# Altium PCB djb_v2_rigid_left_rev.PcbDoc
Units mm, origin at the board's own origin, x right, y up, seen from the top; angles counter-clockwise.
Board outline 29 x 14.8 mm, 4 copper layers (Top Layer, Int1 (GND), Int2 (PWR), Bottom Layer), stack 1.369 mm thick; 71 components, 48 nets, 264 pads, 96 vias.
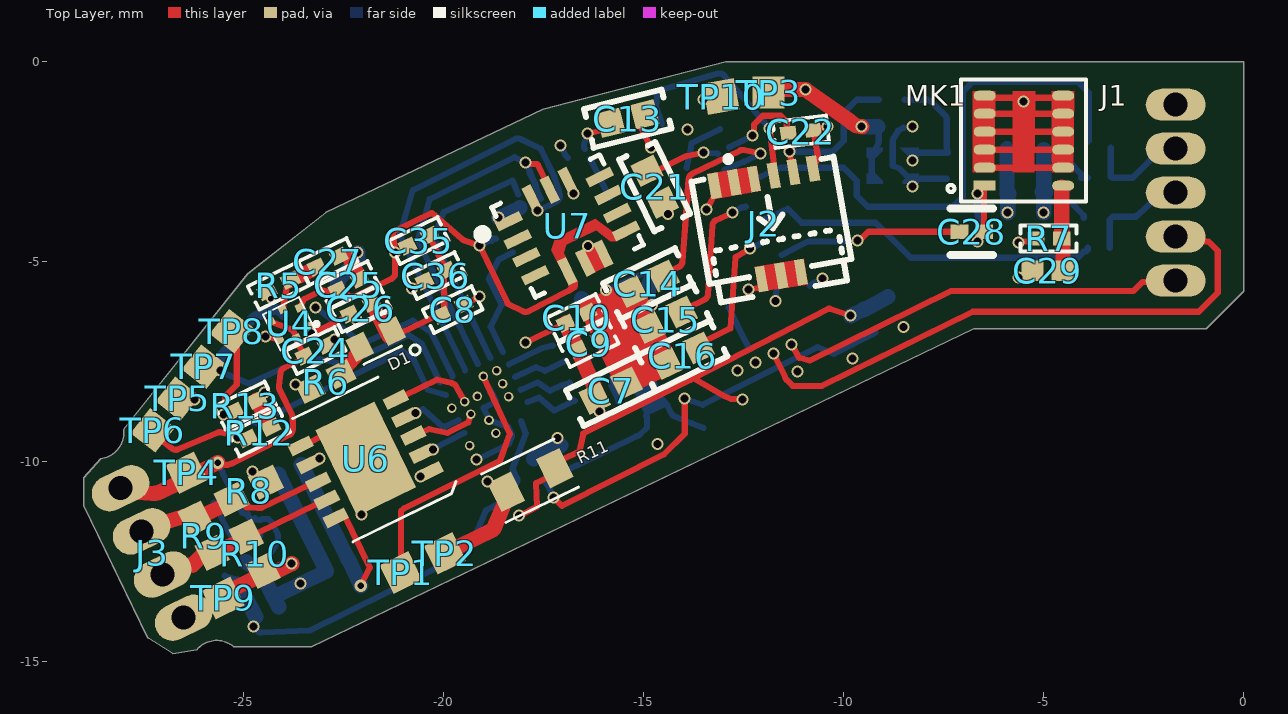
[diagram p0: Top Layer view]
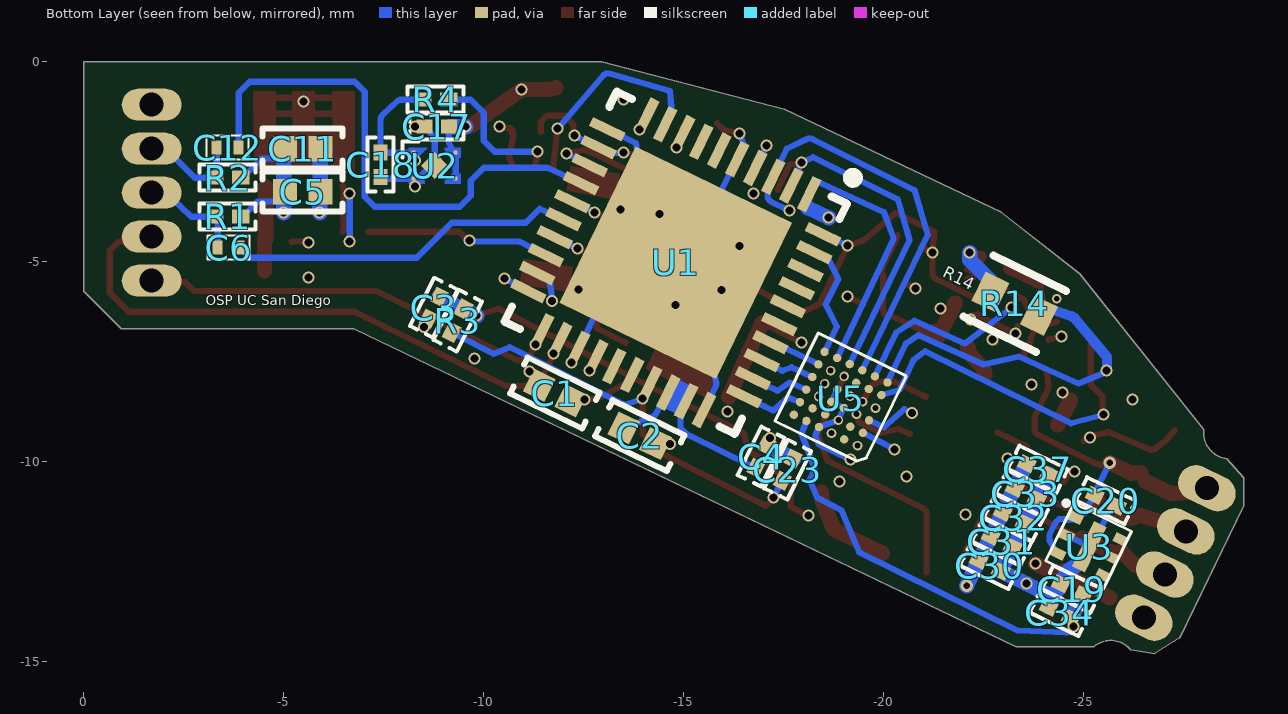
[diagram p1: Bottom Layer view, seen from below]
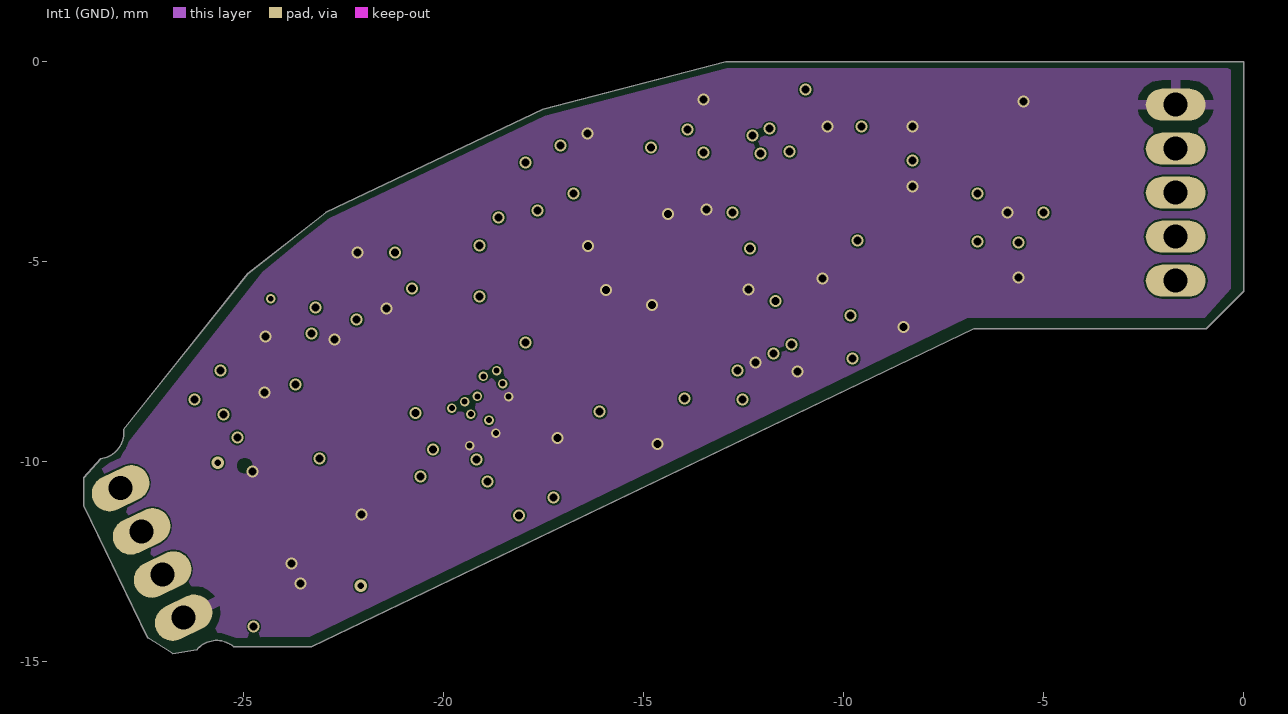
[diagram p2: Int1 (GND)]
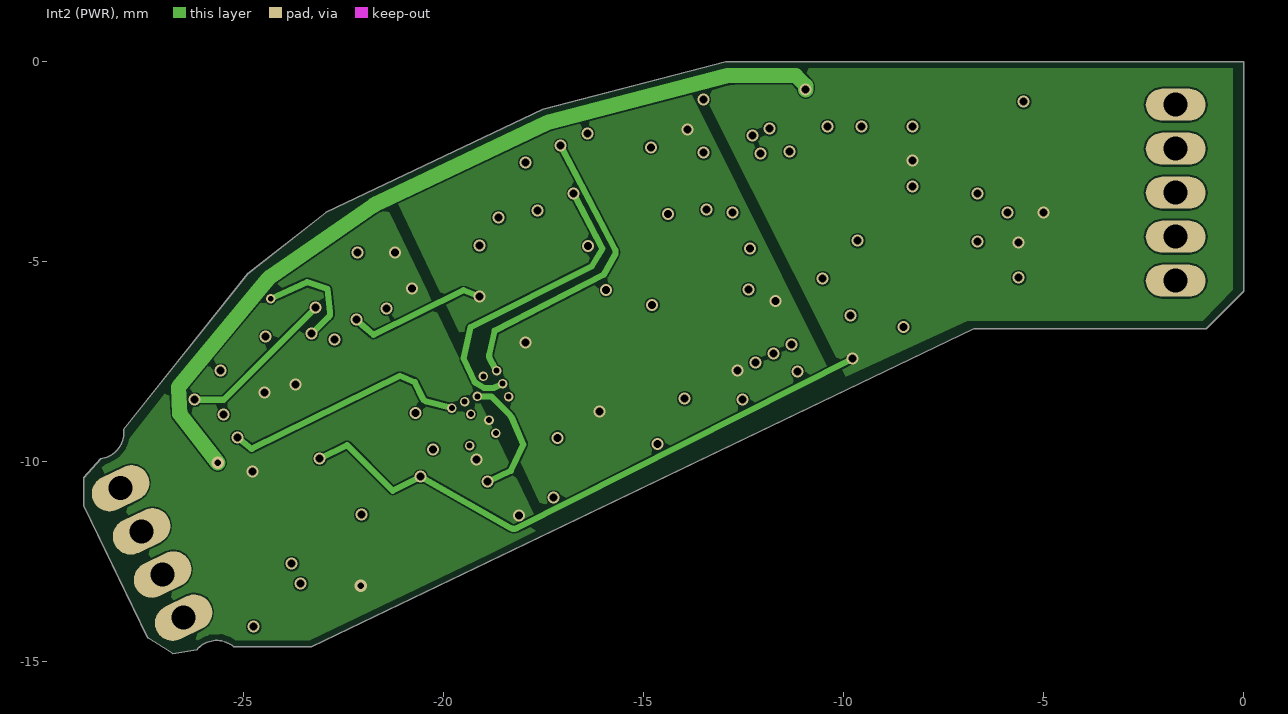
[diagram p3: Int2 (PWR)]
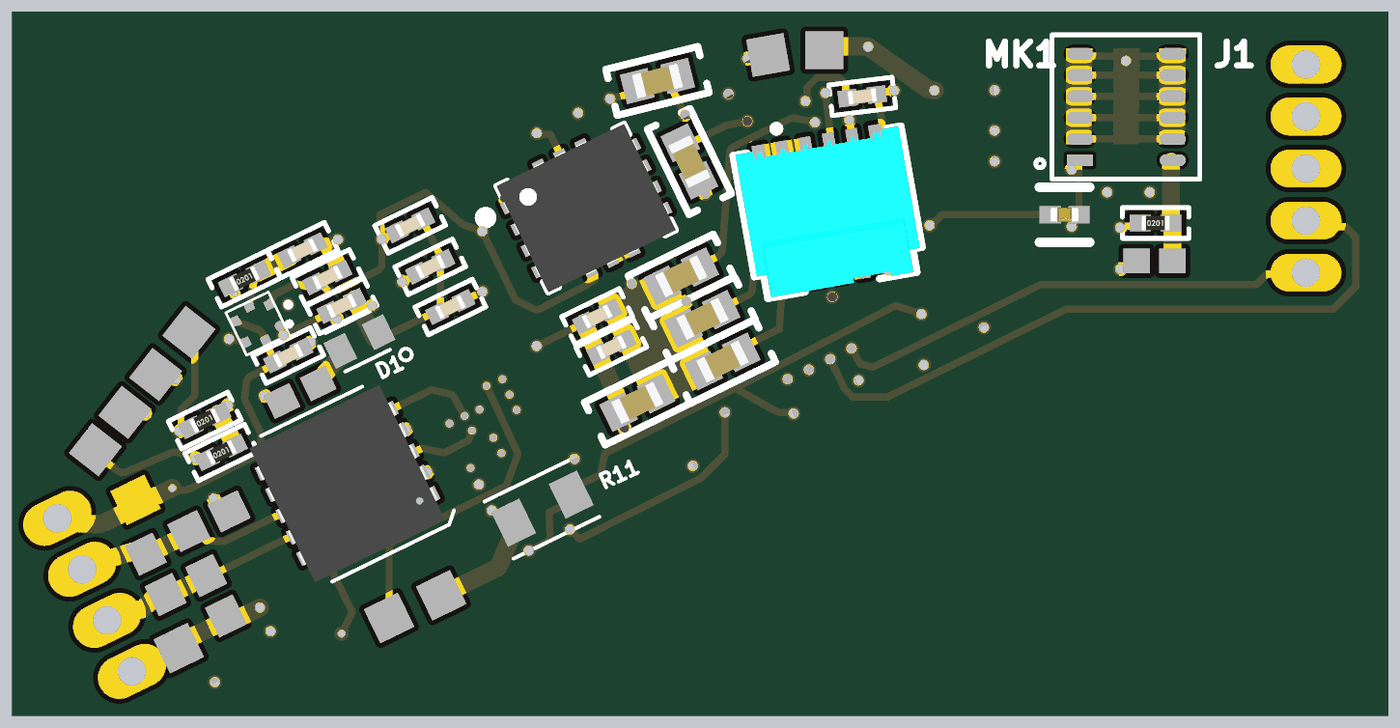
[diagram p4: 3D render of the assembled board from above, using the file's embedded part models]
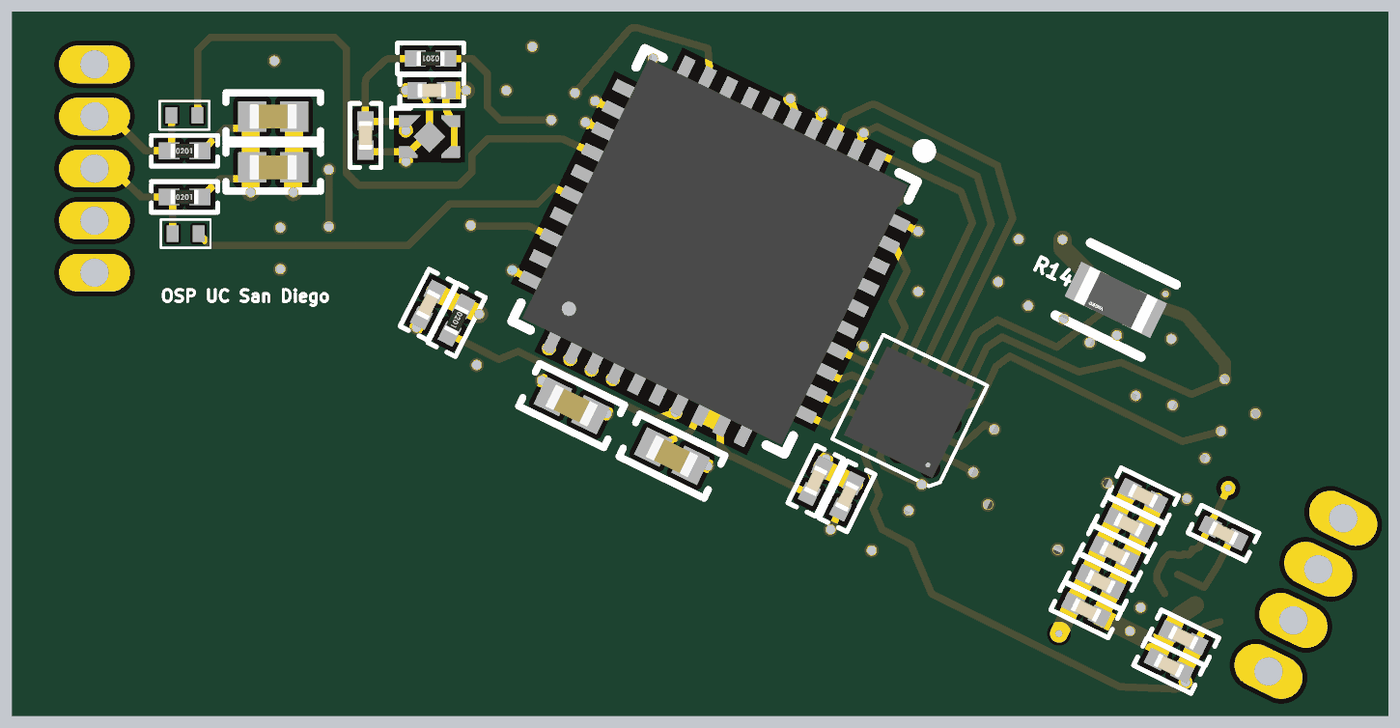
[diagram p5: 3D render of the assembled board from below, using the file's embedded part models]

## Layer stack, top to bottom
Top Solder: solder mask 0.0254, SM-001, Dk 4
Top Layer: signal copper 0.035
Dielectric 1: prepreg 0.1295, PP-017, Dk 4.3
Dielectric 2: prepreg 0.1295, PP-017, Dk 4.3
Int1 (GND): signal copper 0.035
Dielectric 3: core 0.7112, Core-039, Dk 4.8
Int2 (PWR): signal copper 0.035
Dielectric 4: prepreg 0.1295, PP-017, Dk 4.3
Dielectric 5: prepreg 0.1295, PP-017, Dk 4.3
Bottom Layer: signal copper 0.035
Bottom Solder: solder mask 0.0254, SM-001, Dk 4

## Board outline
-26.773,-14.796 -26.177,-14.704 cw(c-25.674,-15.123) -25.255,-14.621 -25.265,-14.625 -23.308,-14.625 -6.75,-6.675 -0.936,-6.675 0,-5.739 0,0 -12.947,0 -17.516,-1.192 -22.944,-3.767 -24.9,-5.3 -28.003,-9.197 cw(c-28.653,-9.275) -28.575,-9.925 -29,-10.4 -29,-11.1 -27.398,-14.405 -27.385,-14.409

## Design rules (kind name [scope] priority, off if disabled: settings)
BoardOutlineClearance BoardOutlineClearance_Silk [OnLayer('Top Overlay') Or OnLayer('Bottom Overlay')] p1: gap=0 ignorepadtopadclearanceinfootprint=FALSE
BoardOutlineClearance BoardOutlineClearance_Normal [All] p2: gap=0.152 ignorepadtopadclearanceinfootprint=FALSE
Clearance [All] p1: gap=0.04 ignorepadtopadclearanceinfootprint=FALSE
ComponentClearance [All] p1: gap=0 collisioncheckmode=3 verticalgap=0 showdistances=FALSE
DiffPairsRouting [All] p1: maxlimit=0.254 minlimit=0.152 mostfreqgap=0.254 toplayer_minwidth=0.152 toplayer_maxwidth=0.381 toplayer_prefwidth=0.254 midlayer1_minwidth=0.152 midlayer1_maxwidth=0.381 midlayer1_prefwidth=0.254 midlayer2_minwidth=0.152 midlayer2_maxwidth=0.381 midlayer2_prefwidth=0.254 bottomlayer_minwidth=0.152 bottomlayer_maxwidth=0.381 bottomlayer_prefwidth=0.254 maxuncoupledlength=12.7
MinimumSolderMaskSliver [All] p1: minsoldermaskwidth=0.076
PasteMaskExpansion [All] p1 off: expansion=0
PlaneClearance [All] p1: clearance=0.254
PlaneConnect PlaneConnect_Via [IsVia] p1: planeconnectstyle=Direct reliefexpansion=0.254 reliefentries=4 reliefconductorwidth=0.254 reliefairgap=0.203
PlaneConnect PlaneConnect_Normal [All] p2: pad.planeconnectstyle=Relief pad.reliefexpansion=0.254 pad.reliefentries=4 pad.reliefconductorwidth=0.254 pad.reliefairgap=0.203 via.planeconnectstyle=Direct via.reliefexpansion=0.254 via.reliefentries=4 via.reliefconductorwidth=0.254 via.reliefairgap=0.203
PolygonConnect PolygonConnect_Normal [All] p1: thpad.connectstyle=Relief thpad.reliefconductorwidth=0.254 thpad.reliefentries=4 thpad.polygonreliefangle="90 Angle" thpad.airgapwidth=0.203 smdpad.connectstyle=Relief smdpad.reliefconductorwidth=0.254 smdpad.reliefentries=4 smdpad.polygonreliefangle="90 Angle" smdpad.airgapwidth=0.203 via.connectstyle=Direct via.reliefconductorwidth=0.254 via.reliefentries=4 via.polygonreliefangle="90 Angle" via.airgapwidth=0.254
RoutingVias [All] p1: holewidth=0.152 width=0.305 viastyle="Through Hole" minholewidth=0.127 minwidth=0.241 maxholewidth=1.27 maxwidth=2.54
SilkToSilkClearance [All] p1: silktosilkclearance=-25.4
SilkToSolderMaskClearance [IsPad] p1: minsilkscreentomaskgap=-25.4 clearancetoexposedcopper=TRUE
SolderMaskExpansion [All] p1 off: expansion=0.102 istentingtop=FALSE
Width [All] p1: maxlimit=0.381 minlimit=0.05 preferedwidth=0.152
22 further rules are at their usual default settings.

## Classes and differential pairs
component class rigidPCB2_rev: C30 C31 C32 C33 C34 C37 J3 R8 R9 R10 R12 R13 R14 TP1 TP2 TP3 TP4 TP5 TP6 TP7 TP8 TP9 TP10 U5 U6
component class rigidPCB_rev: C1 C2 C3 C4 C5 C6 C7 C11 C12 C17 C18 C19 C20 C21 C22 C23 C24 C25 C26 C27 C28 C29 J1 J2 MK1 R1 R2 R3 R4 R5 R6 R7 U1 U2 U3 U4
differential pair LVDS: +LVDS_P -LVDS_N

## Components (designator, comment, footprint, x,y, rotation, side; value= is the part's Value field where it differs from the comment)
C1 "10uF" "CAP 0402/1005" -11.78,-8.282 r26 bottom
C2 "10uF" "CAP 0402/1005" -13.9,-9.35 r206 bottom
C3 "0.10uF" "CAP 0201/0603" -8.75,-6.15 r117 bottom
C4 "0.10uF" "CAP 0201/0603" -16.936,-9.871 r296 bottom
C5 "10uF" "CAP 0402/1005" -5.475,-3.25 r180 bottom
C6 "CL03A105KQ3CSNH" CL03A105KQ3CSNH -3.625,-4.65 r180 bottom
C7 "10uF" "CAP 0402/1005" -15.825,-8.225 r206 top
C8 "0.10uF" "CAP 0201/0603" -19.775,-6.2 r206 top
C9 "0.10uF" "CAP 0201/0603" -16.375,-7.05 r26 top
C10 "0.10uF" "CAP 0201/0603" -16.675,-6.4 r26 top
C11 "10uF" "CAP 0402/1005" -5.475,-2.175 r180 bottom
C12 "CL03A105KQ3CSNH" CL03A105KQ3CSNH -3.6,-2.15 r180 bottom
C13 "10uF" "CAP 0402/1005" -15.4,-1.425 r14 top
C14 "10uF" "CAP 0402/1005" -14.9,-5.55 r26 top
C15 "10uF" "CAP 0402/1005" -14.45,-6.45 r26 top
C16 "10uF" "CAP 0402/1005" -14.025,-7.35 r26 top
C17 "1uF" "CAP 0201/0603" -8.825,-1.625 r0 bottom
C18 "1uF" "CAP 0201/0603" -7.425,-2.575 r270 bottom
C19 "1uF" "CAP 0201/0603" -24.704,-13.186 r26 bottom
C20 "1uF" "CAP 0201/0603" -25.55,-10.975 r206 bottom
C21 "10uF" "CAP 0402/1005" -14.725,-3.125 r116 top
C22 "0.10uF" "CAP 0201/0603" -11.075,-1.75 r7 top
C23 "1uF" "CAP 0201/0603" -17.6,-10.2 r116 bottom
C24 "1uF" "CAP 0201/0603" -23.2,-7.225 r26 top
C25 "1uF" "CAP 0201/0603" -22.375,-5.575 r26 top
C26 "1uF" "CAP 0201/0603" -22.075,-6.175 r26 top
C27 "1uF" "CAP 0201/0603" -22.9,-5 r26 top
C28 "GRM033R60J155ME14D" FP-GRM033-0_03-IPC_B -6.8,-4.25 r0 top
C29 "CL03A104KQ3NNNC" CAPC0603X33X15ML03T05 -4.9,-5.225 r0 top
C30 "0.10uF" "CAP 0201/0603" -22.65,-12.6 r206 bottom
C31 "0.10uF" "CAP 0201/0603" -22.95,-12 r206 bottom
C32 "0.10uF" "CAP 0201/0603" -23.25,-11.4 r206 bottom
C33 "0.10uF" "CAP 0201/0603" -23.55,-10.8 r206 bottom
C34 "0.10uF" "CAP 0201/0603" -24.4,-13.775 r26 bottom
C35 "0.10uF" "CAP 0201/0603" -20.625,-4.475 r26 top
C36 "0.10uF" "CAP 0201/0603" -20.2,-5.35 r26 top
C37 "0.10uF" "CAP 0201/0603" -23.854,-10.186 r206 bottom
J1 "mic_speaker_connect" mic_connect -1.7,-5.475 r90 top
J2 "FFC" HIROSE_FH58M-7S-0.25SHW-99 -11.875,-3.575 r190 top
J3 "PIGTAIL" PIGTAIL -28.08,-10.663 r296 top
MK1 "VA1200AA" VA1200AA -4.515,-3.1 r180 top
R1 "1k" "RES 0201/0603" -3.6,-3.875 r180 bottom
R2 "1k" "RES 0201/0603" -3.6,-2.9 r180 bottom
R3 "1k" "RES 0201/0603" -9.35,-6.475 r297 bottom
R4 "1k" "RES 0201/0603" -8.8,-0.95 r0 bottom
R5 "3k" "RES 0201/0603" -24.125,-5.6 r26 top
R6 "RC0402FR-071K4L" RESC1005X40X25NL05T10 -22.95,-8 r206 top
R7 "1k" "RES 0201/0603" -4.875,-4.425 r0 top
R8 "RC0402FR-07470RL" RESC1005X40X25ML05T10 -24.875,-10.725 r26 top
R9 "RC0402FR-0745R3L" RESC1005X40X25ML05T10 -26,-11.849 r116 top
R10 "RC0402FR-07470RL" RESC1005X40X25ML05T10 -24.725,-12.3 r116 top
R12 "4.7k" "RES 0201/0603" -24.615,-9.273 r26 top
R13 "4.7k" "RES 0201/0603" -24.965,-8.598 r26 top
R14 "RC0603FR-0710KL" FP-RC0603-0_55-IPC_C -23.275,-6.05 r26 bottom
TP1 "TP_SMD_DJB" TP_SMD_DJB#1 -22.191,-13.231 r116 top
TP2 "TP_SMD_DJB" TP_SMD_DJB#2 -19.91,-12.42 r90 top
TP3 "TP_SMD_DJB" TP_SMD_DJB#3 -19.58,-6.659 r90 top
TP4 "TP_SMD_DJB" TP_SMD_DJB#4 -25.825,-11.05 r116 top
TP5 "TP_SMD_DJB" TP_SMD_DJB#5 -26.526,-8.307 r90 top
TP6 "TP_SMD_DJB" TP_SMD_DJB#6 -27.195,-9.175 r137 top
TP7 "TP_SMD_DJB" TP_SMD_DJB#7 -25.875,-7.475 r90 top
TP8 "TP_SMD_DJB" TP_SMD_DJB#8 -25.169,-6.659 r90 top
TP9 "TP_SMD_DJB" TP_SMD_DJB#9 -25.575,-13.1 r90 top
TP10 "TP_SMD_DJB" TP_SMD_DJB#10 -24.145,-12.687 r90 top
U1 "" ADAU1772BCPZ -14.768,-5.065 r116 bottom
U2 "MIC5504-1.8YMT" MICREL_DFN4 -8.775,-2.6 r270 bottom
U3 "MIC5367 LDO 1.2V" "MIC5367 LDO 1.2V" -429.653,-1620.981 r26 bottom
U4 "MIC5380/1-xxYFT" "06L FCSTSLP" -23.85,-6.55 r206 top
U5 "ICE5LP4K-SWG36ITR1K" 36-XFBGA -19.326,-9.593 r26 bottom
U6 "STR485" STR485LVQT -21.95,-9.925 r206 top
U7 "BMI160" BMI160 -16.906,-4.11 r26 top

## Footprints (in the part's own frame and the unit in brackets; to place one, negate y for a bottom-side part, rotate by r counter-clockwise, add the part's x,y. Pads: shape width x height; smd on the part's side, far side on the other; paste and mask are expansions set on the pad)
"06L FCSTSLP" [mm] "6-Pin 1mm x 1mm Thin MLF®   (FT)"
  oct 0.2x0.2 smd mask+0.01: 1(-0.4,0.25)
  rect 0.2x0.2 smd mask+0.01: 2(-0.4,-0.25) 3(0,-0.4) 4(0.4,-0.25) 5(0.4,0.25) 6(0,0.4)
  silkscreen extent -0.65,-0.5 0.5,0.5, body extent -0.5,-0.5 0.5,0.5, height 0.5
36-XFBGA [mm]
  round 0.21 smd mask+0.02: A1(0,0) A2(0.35,0) A3(0.7,0) A4(1.05,0) A5(1.4,0) A6(1.75,0) B1(0,-0.35) B2(0.35,-0.35) B3(0.7,-0.35) B4(1.05,-0.35) B5(1.4,-0.35) B6(1.75,-0.35) C1(0,-0.7) C2(0.35,-0.7) C3(0.7,-0.7) C4(1.05,-0.7) C5(1.4,-0.7) C6(1.75,-0.7) D1(0,-1.05) D2(0.35,-1.05) D3(0.7,-1.05) D4(1.05,-1.05) D5(1.4,-1.05) D6(1.75,-1.05) E1(0,-1.4) E2(0.35,-1.4) E3(0.7,-1.4) E4(1.05,-1.4) E5(1.4,-1.4) E6(1.75,-1.4) F1(0,-1.75) F2(0.35,-1.75) F3(0.7,-1.75) F4(1.05,-1.75) F5(1.4,-1.75) F6(1.75,-1.75)
  silkscreen extent -0.35,-2.1 2.1,0.35, body extent -0.17,-1.92 1.92,0.17, height 0.49
ADAU1772BCPZ [mm] "General Purpose Audio Codec 4ADC / 2DAC Ch 40-Pin LFCSP"
  rect 0.9x0.25 smd: 1(3.05,-2.261) 2(3.05,-1.761) 3(3.05,-1.261) 4(3.05,-0.761) 5(3.05,-0.261) 6(3.05,0.239) 7(3.05,0.739) 8(3.05,1.239) 9(3.05,1.739) 10(3.05,2.239) 21(-2.95,2.239) 22(-2.95,1.739) 23(-2.95,1.239) 24(-2.95,0.739) 25(-2.95,0.239) 26(-2.95,-0.261) 27(-2.95,-0.761) 28(-2.95,-1.261) 29(-2.95,-1.761) 30(-2.95,-2.261)
  rect 0.25x0.9 smd: 11(2.3,2.989) 12(1.8,2.989) 13(1.3,2.989) 14(0.8,2.989) 15(0.3,2.989) 16(-0.2,2.989) 17(-0.7,2.989) 18(-1.2,2.989) 19(-1.7,2.989) 20(-2.2,2.989) 31(-2.2,-3.011) 32(-1.7,-3.011) 33(-1.2,-3.011) 34(-0.7,-3.011) 35(-0.2,-3.011) 36(0.3,-3.011) 37(0.8,-3.011) 38(1.3,-3.011) 39(1.8,-3.011) 40(2.3,-3.011)
  rect 4.35x4.35 smd: 41(0.05,-0.011)
  silkscreen extent -3.15,-3.21 4.03,3.19, body extent -3,-3.07 3.1,3.02, height 0.81
BMI160 [mm] "IMU accelerometer"
  rect 0.675x0.25 smd: 1(-1.263,0.75) 2(-1.262,0.25) 3(-1.263,-0.25) 4(-1.262,-0.75) 8(1.262,-0.75) 9(1.262,-0.25) 10(1.263,0.25) 11(1.262,0.75)
  rect 0.25x0.675 smd: 5(-0.5,-1.013) 6(0,-1.012) 7(0.5,-1.013) 12(0.5,1.013) 13(0,1.013) 14(-0.5,1.013)
  silkscreen extent -2.1,-1.25 1.5,1.25, body extent -1.52,-1.27 1.52,1.27, height 0.83
"CAP 0201/0603" [mm] "Chip Capacitor, 2-Leads, Body 0.60x0.30mm, IPC Medium Density"
  rect 0.4x0.35 smd: 1(0.31,0) 2(-0.31,0)
  silkscreen extent -0.68,-0.33 0.67,0.32, body extent -0.3,-0.15 0.3,0.15, height 0.3
"CAP 0402/1005" [mm] "Chip Capacitor, 2-Leads, Body 1.02x0.51mm, IPC Medium Density"
  rect 0.6x0.64 smd: 1(0.44,0) 2(-0.44,0)
  silkscreen extent -1,-0.5 1,0.5, body extent -0.5,-0.26 0.5,0.26, height 0.52
CAPC0603X33X15ML03T05 [mm] "Chip Capacitor, 2-Leads, Body 0.60x0.30mm, IPC Low Density"
  rect 0.56x0.52 smd: 1(-0.38,0) 2(0.38,0)
  body extent -0.31,-0.17 0.31,0.17, height 0.33
CL03A105KQ3CSNH [mm]
  rect 0.25x0.35 smd mask+0.05: 1(-0.275,0) 2(0.275,0)
  silkscreen extent -0.53,-0.3 0.53,0.3, body extent -0.3,-0.15 0.3,0.15, height 0.3
FP-GRM033-0_03-IPC_B [mm]
  rect 0.454x0.363 smd paste+0 mask+0: 1(-0.304,0) 2(0.304,0)
  silkscreen extent -0.53,-0.58 0.53,0.58, body extent -0.3,-0.15 0.3,0.15, height 0.33
FP-RC0603-0_55-IPC_C [mm]
  rect 0.659x0.812 smd paste+0 mask+0: 1(-0.677,0) 2(0.677,0)
  silkscreen extent -1.01,-0.85 1.01,0.85, body extent -0.8,-0.4 0.8,0.4, height 0.55
HIROSE_FH58M-7S-0.25SHW-99 [mm] "Hirose FH58M-7S-0.25SHW(99) Top+Bottom Contacts 7-pin FFC Connector"
  rect 0.25x0.65 smd: 1(0.75,-0.7) 2(0.5,1.8) 3(0.25,-0.7) 4(0,1.8) 5(-0.25,-0.7) 6(-0.5,1.8) 7(-0.75,-0.7)
  rect 0.27x0.65 smd: S(-1.25,-0.7) S(1.25,-0.7)
  silkscreen extent -1.8,-1.32 1.8,2.2, body extent -1.75,-0.91 1.75,2.19, height 0.9
"MIC5367 LDO 1.2V" [mm] "MIC5367 LDO 1.2V"
  rect 0.35x0.25 smd mask+0.01: 1(1069.473,-1269.206) 2(1069.473,-1268.706) 3(1069.473,-1268.206) 4(1068.223,-1268.206) 5(1068.223,-1268.706) 6(1068.223,-1269.206)
  rect 0.35x1.26 smd mask+0.01: 7(1068.848,-1268.706)
  silkscreen extent 1068.07,-1269.51 1069.9,-1267.91, body extent 1068.08,-1269.53 1069.68,-1267.92, height 0.8
mic_connect [mm] "mic-reciever connector"
  oval 0.8x1.5 hole 0.6: 1(0,0) 2(1.1,0) 3(2.2,0) 4(3.3,0) 5(4.4,0)
MICREL_DFN4 [mm] "Micrel DFN-4 from MIC5504-1.8YMT datasheet"
  rect 0.1x0.1 smd: 1(-0.325,-0.525) 2(0.325,-0.525) 3(0.325,0.525) 4(-0.325,0.525)
  rect 0.48x0.48 smd rot 45: EP(0,0)
  Top Layer region: 0.45,0.65 0.2,0.65 0.2,0.43 0.38,0.25 0.45,0.25
  Top Layer region: -0.45,0.65 -0.2,0.65 -0.2,0.43 -0.38,0.25 -0.45,0.25
  Top Layer region: 0.45,-0.65 0.2,-0.65 0.2,-0.43 0.38,-0.25 0.45,-0.25
  Top Layer region: -0.45,-0.18 -0.45,-0.65 -0.2,-0.65 -0.2,-0.43
  silkscreen extent -0.6,-0.8 -0.2,-0.4, body extent -0.5,-0.5 0.5,0.5, height 0.57
PIGTAIL [mm]
  oval 0.9x1.5 hole 0.6: 1(0,0) 2(1.2,0) 3(2.4,0) 4(3.6,0)
"RES 0201/0603" [mm] "Chip Resistor, 2-Leads, Body 0.60x0.30mm, IPC Medium Density"
  rect 0.44x0.35 smd: 1(-0.325,0) 2(0.325,0)
  silkscreen extent -0.7,-0.33 0.7,0.33, body extent -0.3,-0.15 0.3,0.15, height 0.21
RESC1005X40X25ML05T10 [mm] "Chip Resistor, 2-Leads, Body 1.00x0.50mm, IPC Low Density"
  rect 0.7x0.65 smd: 1(-0.475,0) 2(0.475,0)
  body extent -0.53,-0.27 0.53,0.28, height 0.4
RESC1005X40X25NL05T10 [mm] "Chip Resistor, 2-Leads, Body 1.00x0.50mm, IPC Medium Density"
  rect 0.6x0.55 smd: 1(-0.425,0) 2(0.425,0)
  body extent -0.53,-0.28 0.53,0.28, height 0.4
STR485LVQT [mm] "3.3V RS485 compatible with 1.8V I/Os and selectable speed 20Mbps or 250kbps"
  rect 0.6x0.3 smd: 1(-1.323,1) 2(-1.323,0.5) 3(-1.323,0) 4(-1.323,-0.5) 5(-1.323,-1) 6(1.323,-1) 7(1.323,-0.5) 8(1.323,0) 9(1.323,0.5) 10(1.323,1)
  rect 1.646x2.384 smd: 11(0,0)
  silkscreen extent -1.77,-1.7 1.2,1.73, body extent -1.57,-1.57 1.58,1.58, height 0.99
TP_SMD_DJB#1 [mm] "DJB style test point"
  rect 0.8x0.8 smd: 1(-0.077,-1.21)
TP_SMD_DJB#2 [mm] "DJB style test point"
  rect 0.8x0.8 smd rot 26: 1(0.13,0.06)
TP_SMD_DJB#3 [mm] "DJB style test point"
  rect 0.8x0.8 smd: 1(5.884,-7.705)
TP_SMD_DJB#4 [mm] "DJB style SMD test point"
  rect 0.8x0.8 smd paste-1000: 1(0.96,0.2)
TP_SMD_DJB#5 [mm] "DJB style test point"
  rect 0.8x0.8 smd rot 142: 1(-0.118,0.124)
TP_SMD_DJB#6 [mm] "DJB style test point"
  rect 0.8x0.8 smd rot 95: 1(0.031,0.085)
TP_SMD_DJB#7 [mm] "DJB style test point"
  rect 0.8x0.8 smd rot 142: 1(-0.15,0.125)
TP_SMD_DJB#8 [mm] "DJB style test point"
  rect 0.8x0.8 smd rot 142: 1(-0.077,0.131)
TP_SMD_DJB#9 [mm] "DJB style test point"
  rect 0.8x0.8 smd rot 26: 1(-0.307,-0.062)
TP_SMD_DJB#10 [mm] "DJB style test point"
  rect 0.8x0.8 smd rot 100: 1(11.812,-11.082)
VA1200AA [mm]
  rect 0.55x0.25 smd mask+0.07: 1(1.96,0)
  oval 0.55x0.25 smd mask+0.07: 2(1.96,-0.45) 3(1.96,-0.9) 4(1.96,-1.35) 5(1.96,-1.8) 6(1.96,-2.25) 7(0,-2.25) 8(0,-1.8) 9(0,-1.35) 10(0,-0.9) 11(0,-0.45) 12(0,0)
  silkscreen extent -0.58,-2.65 2.89,0.4, body extent 0.1,-2.5 1.95,0.25, height 0.93

## Part data
C1 C2 C5 C7 C11 C13 C14 C15 C16 C21: library part C1005X5R0J106M050BC, "CAP CER 10UF 6.3V X5R 0402", Device Package="0402 (1005 Metric)", Manufacturer="TDK Corporation", Supplier Part Number 1=445-8920-2-ND, TemperatureCoefficient=X5R, TemperatureRange="-55C ~ 85C", Tolerance=20%, Voltage=6.3V, ComponentLink1Description=Datasheet, ComponentLink1URL=https://product.tdk.com/info/en/catalog/datasheets/mlcc_commercial_general_en.pdf, ComponentLink2Description="Digi-Key Listing", ComponentLink2URL=https://www.digikey.com/product-detail/en/tdk-corporation/C1005X5R0J106M050BC/445-8920-2-ND/3507809, Part Number=C1005X5R0J106M050BC, PartId=12380, Price=0.119, Supplier 1=Digi-Key
C3 C4 C8 C9 C10 C22 C30 C31 C32 C33 C34 C35 C36 C37: library part CL03A104KP3NNNC, "CAP CER 0.1UF 10V X5R 0201", Device Package="0201 (0603 Metric)", Manufacturer="Samsung Electro-Mechanics America, Inc.", Supplier Part Number 1=1276-1115-2-ND, TemperatureCoefficient=X5R, TemperatureRange="-55C ~ 85C", Tolerance=10%, Voltage=10V, ComponentLink1Description=Datasheet, ComponentLink1URL=http://www.samsungsem.com/kr/support/product-search/mlcc/__icsFiles/afieldfile/2016/08/18/S_CL03A104KP3NNND.pdf, ComponentLink2Description="Digi-Key Listing", ComponentLink2URL=https://www.digikey.com/product-detail/en/samsung-electro-mechanics-america-inc/CL03A104KP3NNNC/1276-1115-2-ND/3886773, Part Number=CL03A104KP3NNNC, PartId=20562, Price=0.0031, Supplier 1=Digi-Key
C6 C12: "1 µF ±10% 6.3V Ceramic Capacitor X5R 0201 (0603 Metric)", Supplier Part Number 1=1276-6440-1-ND, Supplier 1=Digi-Key
C17 C18 C19 C20 C23 C24 C25 C26 C27: library part 02016D105MAT2A, "CAP CER 1UF 6.3V X5R 0201", Device Package="0201 (0603 Metric)", Manufacturer="AVX Corporation", Supplier Part Number 1=478-7862-2-ND, TemperatureCoefficient=X5R, TemperatureRange="-55C ~ 85C", Tolerance=20%, Voltage=6.3V, ComponentLink1Description=Datasheet, ComponentLink1URL=http://datasheets.avx.com/cx5r.pdf, ComponentLink2Description="Digi-Key Listing", ComponentLink2URL=https://www.digikey.com/product-detail/en/avx-corporation/02016D105MAT2A/478-7862-2-ND/3079664, Part Number=02016D105MAT2A, PartId=20442, Price=0.063, Supplier 1=Digi-Key
C28: library part CMP-06035-017352-1, "Chip Multilayer Ceramic Capacitors for General Purpose, 0201, 1.5uF, X5R, 15%, 20%, 6.3V", Capacitance=1.5uF, Case Code (Imperial)=0201, Case Code (Metric)=0603, Dielectric=X5R, Max Operating Temperature=85°C, Min Operating Temperature=-55°C, Tolerance=20%, Voltage Rating=6.3V, Case/Package=0201, Length=0.024inch, Mount="Surface Mount", Packaging="Tape and Reel", Thickness=0.013inch, Voltage Rating (DC)=6.3V, Width=0.012inch
C29: library part CMP-2010-00674-1, Manufacturer=Samsung, Part Number=CL03A104KQ3NNNC
J1: "connector to integrated microphone and speaker"
J2: library part HIROSE_FH58M-7S-0.25SHW-99, "Hirose FH58M-7S-0.25SHW(99) 7-pin Top+Bottom Contact FFC Connector"
MK1: "Bone Conductor Sensor Accelerometer"
R1 R2 R3 R4 R7: library part RC0201JR-071KL, "RES SMD 1K OHM 5% 1/20W 0201", Device Package="0201 (0603 Metric)", Manufacturer=Yageo, PowerRating="0.05W, 1/20W", Supplier Part Number 1=311-1KNTR-ND, TemperatureCoefficient=200ppm/C, TemperatureRange="-55C ~ 125C", Tolerance=5%, ComponentLink1Description=Datasheet, ComponentLink1URL=http://www.yageo.com/documents/recent/PYu-RC_Group_51_RoHS_L_04.pdf, ComponentLink2Description="Digi-Key Listing", ComponentLink2URL=https://www.digikey.com/product-detail/en/yageo/RC0201JR-071KL/311-1KNTR-ND/1948922, Part Number=RC0201JR-071KL, PartId=19463, Price=0.0042, Supplier 1=Digi-Key
R5: library part RC0201FR-073KL, "RES SMD 3K OHM 1% 1/20W 0201", Device Package="0201 (0603 Metric)", Manufacturer=Yageo, PowerRating="0.05W, 1/20W", Supplier Part Number 1=YAG2656TR-ND, TemperatureCoefficient=200ppm/C, TemperatureRange="-55C ~ 125C", Tolerance=1%, ComponentLink1Description=Datasheet, ComponentLink1URL=http://www.yageo.com/documents/recent/PYu-RC_Group_51_RoHS_L_04.pdf, ComponentLink2Description="Digi-Key Listing", ComponentLink2URL=https://www.digikey.com/product-detail/en/yageo/RC0201FR-073KL/YAG2656TR-ND/5280516, Part Number=RC0201FR-073KL, PartId=19520, Price=0.0042, Supplier 1=Digi-Key
R6: library part CMP-2002-07461-1, Manufacturer="Yageo / Phycomp", Part Number=RC0402FR-071K4L
R8 R10: library part CMP-2002-07697-1, Manufacturer="Yageo / Phycomp", Part Number=RC0402FR-07470RL
R9: library part CMP-2002-07109-1, Manufacturer="Yageo / Phycomp", Part Number=RC0402FR-0745R3L
R12 R13: library part RC0201FR-074K7L, "RES SMD 4.7K OHM 1% 1/20W 0201", Device Package="0201 (0603 Metric)", Manufacturer=Yageo, PowerRating="0.05W, 1/20W", Supplier Part Number 1=311-4.70KMTR-ND, TemperatureCoefficient=200ppm/C, TemperatureRange="-55C ~ 125C", Tolerance=1%, ComponentLink1Description=Datasheet, ComponentLink1URL=http://www.yageo.com/documents/recent/PYu-RC_Group_51_RoHS_L_04.pdf, ComponentLink2Description="Digi-Key Listing", ComponentLink2URL=https://www.digikey.com/product-detail/en/yageo/RC0201FR-074K7L/311-4.70KMTR-ND/1948894, Part Number=RC0201FR-074K7L, PartId=19526, Price=0.0056, Supplier 1=Digi-Key
R14: library part CMP-2100-03664-2, "RES 10K OHM 1% 1/10W 0603", Case Code (Imperial)=0603, Case Code (Metric)=1608, Max Operating Temperature=155°C, Max Power Dissipation=100mW, Min Operating Temperature=-55°C, Resistance=10kR, Resistance Tolerance=1%, Resistor Type="Thick Film", Temperature Coefficient=100ppm/°C, Voltage Rating=75V, Voltage Rating (DC)=50V, Case/Package=0603, Construction=Rectangular, Depth=0.8mm, Features="Moisture Resistant", Height=0.45mm, Lead Free="Lead Free", Lead Pitch=0.3mm, Length=1.6mm, Military Standard=Not, Number of Pins=2, Number of Terminations=2, Packaging="Tape and Reel", Power Rating=100mW, RoHS Compliant=Yes, Series=RC, Size Code=0603, Termination=SMD/SMT, Tolerance=1%, Weight=7.1E-05oz, Width=0.8mm
TP1 TP2 TP3 TP4 TP5 TP6 TP7 TP8 TP9 TP10: "Digital Jellybean Style SMD Test Point", DNP=DNP
U1: library part ADAU1772BCPZ, "General Purpose Audio Codec 4ADC / 2DAC Ch 40-Pin LFCSP", Supplier 1="Arrow Electronics", Supplier 2=RSComponents, Supplier Part Number 1=ADAU1772BCPZ, Supplier Part Number 2=8071681
U2: library part MICREL_MIC5504-1.8YMT, "Micrel MIC5504-1.8YMT 1.8V 300mA LDO"
U3: Supplier Part Number 1=576-3723-6-ND, Supplier 1=Digi-Key
U4: "LDO 2fixed Outputs", Supplier Part Number 1=576-3453-6-ND, Supplier 1=Digi-Key
U5: "Field Programmable Gate Array (FPGA) IC 25 65536 1280 36-VFBGA", Supplier 1=Digi-Key
U6: "3.3 V LVDS RS485 compatible with 1.8 V I/Os and selectable speed"
U7: library part BMI160_1, "BMI160 2.5 x 3 mm Tiaxial Accelerometer / Gyroscope Inertial Measurement Unit", Package="LGA-14 Bosch", Availability=Good, MF=Bosch, MP=BMI160, Price="3.29 USD"

## Free pads (board coordinates)
  rect 0.5x0.6 smd rot 26 paste+0 mask+0: 1(-21.291,-6.73) 2(-22.1,-7.125)
  rect 0.659x0.812 smd rot 26 paste+0 mask+0: 1(-17.222,-10.162) 2(-18.439,-10.755)

## Via types
v1: diameter 0.3, hole 0.2, Top Layer to Bottom Layer, tented top, 82 vias
v2: diameter 0.241, hole 0.15, Top Layer to Bottom Layer, tented top, 11 vias
v3: diameter 0.305, hole 0.152, Top Layer to Bottom Layer, tented top, 2 vias
v4: diameter 0.241, hole 0.127, Top Layer to Bottom Layer, tented top, 1 vias

## Nets (pads, with @x,y where several pads share a name; then routed paths per layer and width w, separated by ;. In a path a pad name is that pad's centre, name@x,y a point inside that pad or via, vN(x,y) a via of type N, cw(c..) or ccw(c..) an arc to the next point about the centre after c; other vN are vias at no path point)
+1V8: C5.2 C11.2 C18.2 R1.2 R2.2 R4.2 R7.1 U2.1 U6.1 U6.7 | length 23.3
  Top Layer w0.152: v1(-5.625,-4.525) -5.597,-4.497 -5.203,-4.497 R7.1@-5.2,-4.5
  Int2 (PWR) w0.152: v1(-23.1,-9.925) -22.417,-9.583 -21.275,-10.725 v1(-20.575,-10.375) ; v1@-20.55,-10.375 v1(-20.575,-10.375) ; v1(-9.775,-7.425) -18.177,-11.663 cw(c-18.245,-11.527) -18.321,-11.659 -20.556,-10.386 v1(-20.575,-10.375)
  Bottom Layer w0.152: R4.2 -8.331,-0.95 -7.936,-0.95 cw(c-7.936,-1.102) -7.831,-0.992 -7.471,-1.332 cw(c-7.576,-1.442) -7.423,-1.442 -7.423,-2.141 -7.402,-2.261 -7.4,-2.275 -7.425,-2.275 -7.524,-2.275 U2.1 ; C11.2 -5.035,-2.195 -5,-2.23 -4.811,-2.419 -4.451,-2.419 R2.2@-3.97,-2.9 ; C5.2@-4.95,-3.25 -4.95,-3.355 -4.811,-3.494 -4.351,-3.494 -4,-3.845 R1.2@-4,-3.9 ; R2.2@-4.069,-2.9 R2.2@-3.97,-2.9 ; R2.2 R2.2@-3.97,-2.9 ; R2.2@-3.9,-2.9 R2.2@-3.97,-2.9
  Bottom Layer w0.381: C5.2 C5.2@-5,-3.25 ; v1(-5,-3.775) C5.2@-5,-3.25 ; C11.2@-5,-2.2 -5,-2.23 C5.2@-5,-3.25 ; C5.2@-4.95,-3.25 C5.2@-5,-3.25
  other v1: -8.278,-2.471
+3V3_A: C7.1 C8.2 C9.2 C10.2 C26.2 R5.1 U1.10 U1.19 U1.24 U4.1 | length 12.8
  Top Layer w0.05: R5.1 R5.1@-24.36,-5.881
  Top Layer w0.152: U4.1@-23.349,-6.617 -23.349,-6.61 U4.1@-23.345,-6.612 ; v1(-23.3,-6.8) -22.454,-6.387 C26.2 -22.199,-6.345 -22.232,-6.378 -22.232,-6.407 -22.189,-6.45 v1(-22.175,-6.45) ; C8.2 -19.383,-6.013 -19.12,-5.885 v1(-19.1,-5.875) v1@-19.125,-5.875 ; v1(-17.95,-7.025) -17.064,-6.593 -16.956,-6.597 -16.925,-6.599 C10.2@-16.9,-6.6 ; C9.2@-16.625,-7.125 -16.616,-7.131 C9.2@-16.505,-7.207
  Top Layer w0.381: C10.2 -16.925,-6.599 -16.659,-7.188 -16.484,-7.578 -16.179,-8.253 C7.1@-16.125,-8.375
  Int2 (PWR) w0.152: v4(-24.325,-5.925) -23.418,-5.511 -22.901,-5.683 -22.839,-6.264 -22.839,-6.344 -22.882,-6.388 -23.294,-6.8 v1(-23.3,-6.8) ; v1(-22.175,-6.45) -22.075,-6.55 -22.036,-6.584 -21.758,-6.828 -19.503,-5.714 v1(-19.1,-5.875)
  Bottom Layer w0.152: v1(-11.706,-5.984) -11.692,-5.808 cw(c-11.577,-5.817) -11.692,-5.802 -11.651,-5.491 U1.19@-11.152,-5.19
  other v1: -16.1,-8.75 -12.65,-7.725 -13.9,-1.7
+5V: C17.2 C20.2 C24.2 J3.1 TP3.1 TP4.1 U2.3 U2.4 U3.1 U3.3 U4.4 U4.6 | length 36.1
  Top Layer w0.152: J3.1 J3.1@-27.875,-10.75 ; v3@-25.649,-10.023 ccw(c-25.448,-9.689) -25.276,-10.038 -23.858,-9.329 ccw(c-23.927,-9.193) -23.775,-9.193 -23.775,-8.91 ccw(c-23.927,-8.91) -23.79,-8.844 -24.106,-8.19 cw(c-23.969,-8.123) -24.12,-8.107 ; U4.4@-24.325,-6.5 -24.319,-6.502 -24.287,-6.512 -23.833,-6.679 cw(c-23.886,-6.822) -23.748,-6.756 U4.6 -23.682,-6.943 C24.2@-23.482,-7.354 ; -24.12,-8.106 -24.084,-7.784 cw(c-23.933,-7.8) -24,-7.663 -23.571,-7.454 C24.2 -23.479,-7.354 C24.2@-23.475,-7.35
  Top Layer w0.381: J3.1@-27.875,-10.75 -27.284,-10.792 ; -27.283,-10.792 ccw(c-27.257,-10.412) -27.09,-10.755 TP4.1@-26.552,-10.492 ; TP4.1 -26.216,-10.285 -26.186,-10.287 -26.084,-10.236 v3(-25.65,-10.025) ; TP3.1@-11.8,-0.65 -11.665,-0.694 -11.071,-0.694 cw(c-11.071,-1.075) -11.048,-0.694 v1(-10.95,-0.7) -9.837,-1.493 cw(c-10.058,-1.803) -9.799,-1.524 ccw(c-9.54,-1.244) v1@-9.542,-1.625
  Int2 (PWR) w0.381: v3(-25.65,-10.025) -26.591,-8.818 -26.601,-8.805 -26.633,-8.135 -24.408,-5.446 cw(c-24.114,-5.688) -24.331,-5.375 -21.749,-3.588 cw(c-21.532,-3.901) -21.701,-3.559 -21.595,-3.507 cw(c-21.426,-3.848) -21.589,-3.504 -17.431,-1.531 cw(c-17.268,-1.875) -17.365,-1.507 ; -17.364,-1.506 -12.95,-0.355 cw(c-12.854,-0.724) -12.854,-0.343 -11.2,-0.343 ; -11.2,-0.35 -10.95,-0.6 v1(-10.95,-0.7)
  Bottom Layer w0.152: v3(-25.65,-10.025) -25.256,-10.832 -25.041,-11.275 U3.1@-24.925,-11.325 ; U3.1@-24.896,-11.314 -24.895,-11.32 -24.885,-11.361 -24.875,-11.382 -24.825,-11.428 -24.812,-11.44 -24.79,-11.434 -24.715,-11.413 -24.702,-11.441 -24.619,-11.452 -24.573,-11.452 -24.531,-11.432 -24.384,-11.432 -24.29,-11.526 -24.14,-11.832 -24.14,-11.98 -24.167,-12.006 cw(c-24.38,-11.925) -24.183,-12.04 -24.289,-12.222 U3.3@-24.306,-12.252 ; U2.3 U2.4 ; U2.4@-9.275,-2.3 -9.27,-2.291 -9.144,-2.059 ccw(c-9.277,-1.986) -9.125,-1.986 -9.125,-1.724 -9.143,-1.634 C17.2@-9.145,-1.627
  Bottom Layer w0.381: v1(-9.55,-1.625) C17.2@-9.145,-1.625
BCLK: U1.32 U5.C6 | length 1.4
  Bottom Layer w0.152: U5.C6@-18.075,-8.2 U5.C6 -17.645,-8.017 -17.341,-8.228 -17.059,-8.09 U1.32@-16.85,-8.025
CCLK: U1.39 U5.F6 | length 3
  Bottom Layer w0.152: U5.F6 -18.825,-6.625 -18.55,-6.075 -18.869,-5.438 -18.625,-4.95 U1.39
CDONE: TP1.1 U5.E4 | length 6.6
  Top Layer w0.152: TP1.1 -21.07,-11.296 -21.07,-11.244 -20.985,-11.159 -18.596,-9.977 -18.346,-9.301 v2@-19.012,-7.87 ; v2@-19.012,-7.869 v2(-19.011,-7.867)
CRESET: pad.2@-18.439,-10.755 TP2.1 U5.D3 | length 5.5
  Top Layer w0.381: TP2.1 -18.776,-11.708 ; -18.75,-11.675 -18.469,-11.01 pad.2@-18.439,-10.755
  Int2 (PWR) w0.152: v2(-19.16,-8.366) -18.811,-8.366 -18.338,-8.838 -18.307,-8.885 -18.008,-9.567 -18.322,-10.226 ; v1@-18.872,-10.472 v1(-18.9,-10.5) -18.325,-10.225
CS_C: U1.4 U5.E5 | length 8.1
  Int2 (PWR) w0.152: v2@-18.725,-7.65 -18.847,-7.426 cw(c-18.713,-7.353) -18.862,-7.319 -18.724,-6.722 -16.001,-5.328 -15.721,-4.837 ccw(c-15.853,-4.761) -15.718,-4.69 v1(-17.075,-2.1) ; v2@-18.7,-7.7 v2(-18.675,-7.725) v2@-18.686,-7.695
  Bottom Layer w0.152: v1(-17.075,-2.1) -16.964,-2.327 U1.4@-16.9,-2.4
CS_I: U5.D5 U7.12 | length 7.7
  Int2 (PWR) w0.152: v2(-18.525,-8.05) -18.544,-8.059 -18.755,-8.158 -18.991,-8.158 -19.224,-8.014 -19.502,-7.425 -19.333,-6.638 -16.294,-5.107 -16.033,-4.671 v1(-16.75,-3.3)
DMIC: U1.34 U5.E6 | length 1.2
  Bottom Layer w0.152: U5.E6 -17.516,-7.152 U1.34@-17.275,-7.1
DSPK: U1.33 U5.D6 | length 1.4
  Bottom Layer w0.152: U5.D6 -17.698,-7.636 -17.464,-7.729 -17.279,-7.639 U1.33@-16.95,-7.475
GND: C1.1 C2.1 C3.2 C4.2 C5.1 C7.2 C8.1 C9.1 C10.1 C11.1 C13.2 C14.2 C15.2 C16.2 C17.1 C18.1 C19.1 C20.1 C21.2 C22.1 C23.1 C24.1 C25.1 C26.1 C27.1 C29.1 C30.1 C31.1 C32.1 C33.1 C34.1 C35.1 C36.1 C37.1 J1.5 J2.1 J2.2 J2.3 J2.4 J2.6 J2.S J3.4 MK1.2 MK1.3 MK1.4 MK1.5 MK1.6 MK1.7 MK1.8 MK1.9 MK1.10 MK1.11 pad.1@-21.291,-6.73 R10.1 R14.2 TP9.1 TP10.1 U1.5 U1.11 U1.20 U1.23 U1.30 U1.41 U2.2 U2.EP U3.2 U3.7 U4.5 U5.A1 U5.A3 U5.C5 U6.6 U6.11 U7.6 U7.7 | length 46.3
  Top Layer w0.152: v1(-24.45,-6.875) -24.132,-6.939 U4.5@-24.125,-6.95 ; U6.6 -23.37,-9.522 -23.053,-9.367 U6.11@-22.85,-9.275 ; C24.1@-22.81,-7.035 v1(-22.725,-6.95) ; C27.1@-22.5,-4.875 -22.479,-4.905 -22.238,-5.398 C25.1 ; C27.1@-22.491,-4.848 -22.447,-4.804 -22.318,-4.804 -22.289,-4.775 v1(-22.15,-4.775) ; pad.1@-21.175,-6.825 -21.073,-6.781 -20.186,-6.348 C8.1 ; C35.1 -20.321,-4.436 -19.981,-5.133 C36.1@-19.95,-5.2 ; C8.1@-20.025,-6.325 -19.986,-6.193 -19.989,-5.357 C36.1 ; v1(-16.4,-1.8) -16.027,-1.706 ccw(c-16.064,-1.558) -15.954,-1.664 C13.2 ; v1@-13.4,-3.675 v1(-13.425,-3.7) -13.409,-3.67 -13.242,-3.358 J2.S@-13.228,-3.103 ; v1@-12.4,-5.7 v1(-12.375,-5.7) -12.067,-5.646 J2.2 ; J2.S@-10.766,-2.669 -10.65,-2.425 ; C22.1@-10.725,-1.725 -10.653,-1.653 -10.428,-1.653 v1(-10.4,-1.625) ; C22.1@-10.7,-1.775 -10.707,-1.781 -10.738,-1.808 -10.729,-1.884 ccw(c-10.577,-1.866) -10.728,-1.892 -10.637,-2.407 ; MK1.2@-6.5,-2.65 -6.35,-2.65 -4.69,-2.65 -4.54,-2.65 MK1.11 MK1.11@-4.5,-2.65 ; MK1.3@-6.5,-2.2 -6.35,-2.2 -4.69,-2.2 -4.553,-2.242 -4.53,-2.249 MK1.10@-4.525,-2.25 ; MK1.4@-6.5,-1.75 -6.35,-1.75 -4.69,-1.75 MK1.9@-4.55,-1.725 ; MK1.5@-6.5,-1.3 -6.35,-1.3 -4.69,-1.3 -4.54,-1.3 MK1.8 MK1.8@-4.5,-1.3 ; MK1.6@-6.451,-0.9 -5.466,-0.9 -4.641,-0.9 -4.491,-0.9 MK1.7@-4.441,-0.9
  Top Layer w0.381: TP9.1@-25.65,-13.4 -25.552,-13.342 -25.366,-13.231 -24.602,-12.859 -24.565,-12.801 R10.1 -24.514,-12.718 -24.511,-12.725 -24.45,-12.875 -24.444,-12.872 v1(-23.8,-12.55) ; C26.1@-21.791,-6.036 -21.659,-6.295 -21.406,-6.789 pad.1@-21.375,-6.85 ; pad.1@-21.291,-6.73 pad.1@-21.19,-6.803 ; J2.4 J2.4@-11.439,-5.329 ; J1.5@-2.05,-1.075 J1.5@-1.825,-1.05
  Bottom Layer w0.152: C20.1@-25.75,-11.025 -25.732,-11.057 -25.681,-11.149 -25.437,-11.651 U3.7 ; U3.7@-25.143,-12.122 -25.054,-12.079 -24.67,-11.891 U3.2 ; U1.5@-16.475,-2.175 -16.479,-2.167 cw(c-16.345,-2.095) -16.488,-2.043 v1(-16.4,-1.8) ; U1.5 -16.162,-2.767 -15.931,-3.241 U1.41@-15.85,-3.4 ; v1(-15.94,-5.71) U1.41@-14.925,-5.25 ; U1.30@-15.625,-8.5 -15.67,-8.371 -15.801,-8.104 cw(c-15.664,-8.037) -15.811,-7.999 -15.766,-7.831 U1.41@-14.883,-5.265 ; v1(-14.79,-6.085) U1.41@-14.75,-5.275 ; U1.41@-13.925,-2.65 -13.834,-2.219 -13.81,-2.039 U1.11 ; U1.41@-12.875,-6.15 -12.766,-6.368 -12.534,-6.842 U1.23 ; U1.20@-10.85,-5.6 -10.789,-5.554 v1(-10.525,-5.425) v1@-10.553,-5.453 ; C17.1@-8.5,-1.65 -8.501,-1.651 -8.639,-1.724 -8.752,-1.908 ccw(c-8.623,-1.988) -8.775,-1.988 U2.EP -8.609,-2.666 -8.375,-2.9 ; U2.2 -7.524,-2.925 C18.1@-7.425,-2.925
  Bottom Layer w0.381: U3.7@-24.95,-12.5 -24.659,-12.694 cw(c-24.871,-13.011) -24.53,-12.84 ; -24.53,-12.841 C19.1 -24.248,-13.388 C34.1@-24.125,-13.625 ; -24.175,-13.35 -23.573,-13.054 C30.1 C31.1 C32.1 -23.83,-10.937 C37.1@-24.131,-10.337 ; C37.1@-24.129,-10.311 C37.1@-24.125,-10.318 ; R14.2@-22.65,-5.575 -22.65,-5.457 -22.15,-4.957 v1(-22.15,-4.775) ; C23.1@-17.75,-9.925 -17.737,-9.919 C4.2 ; U1.41@-16.55,-5.925 U1.41@-16.184,-6.661 ; C11.1 -5.915,-3.31 C5.1@-5.9,-3.325 ; v1(-5.9,-3.775) C5.1@-5.9,-3.325 ; C5.1@-5.9,-3.275 -5.875,-3.3 C5.1@-5.9,-3.325
  other v1: -23.575,-13.05 -22.05,-11.325 -14.654,-9.557 -17.154,-9.407 -11.15,-7.75 -12.2,-7.525 -8.504,-6.632 -21.425,-6.175 -5.625,-5.4 -16.39,-4.61 -14.39,-3.81 -8.278,-3.121 -8.278,-1.621 -5.5,-1 -13.5,-0.95
  other v2: -19.35,-9.6 -18.695,-9.286 -18.375,-8.375
IN_EN: U5.C1 U6.4 | length 1.3
  Bottom Layer w0.152: v1(-20.706,-8.785) -20.698,-8.785 -20.671,-8.758 -20.514,-8.685 -20.009,-9.139 U5.C1
LRCLK: U1.31 U5.B6 | length 1.4
  Bottom Layer w0.152: U5.B6 -17.614,-8.396 -17.24,-8.72 -17.013,-8.612 ccw(c-17.106,-8.417) -17.011,-8.611 -16.844,-8.53 U1.31@-16.725,-8.475
LVDS_IN: U5.B1 U6.2 | length 0.9
  Bottom Layer w0.152: v1@-20.251,-9.674 U5.B1
  other v1: -20.264,-9.69
LVDS_N: J3.2 R8.1 R9.2 U6.8 | length 4.6
  Top Layer w0.152: R8.1@-25.3,-11.048 -25.026,-11.048 -24.937,-11.137 -24.649,-11.153 -24.551,-11.153 -23.356,-10.57 U6.8
  Top Layer w0.381: J3.2@-27.125,-11.575 -27.284,-11.61 -27.129,-11.562 -26.399,-11.337 R9.2 ; R9.2@-26.125,-11.4 -26.081,-11.375 -25.421,-11.053 R8.1
LVDS_OUT: U5.D2 U6.5 | length 1.9
  Top Layer w0.152: U6.5@-21.05,-8.375 -20.997,-8.35 -20.172,-7.948 -19.792,-8.037 ; -19.791,-8.037 cw(c-19.827,-8.186) -19.694,-8.111 v2(-19.475,-8.5)
LVDS_P: J3.3 R9.1 R10.2 U6.9 | length 4.8
  Top Layer w0.152: R10.2 -24.945,-11.909 -24.95,-11.925 -24.916,-11.909 -24.856,-11.88 -24.691,-11.801 -23.128,-11.039 U6.9
  Top Layer w0.381: J3.3@-27.1,-12.8 -26.889,-12.589 -26.289,-12.589 -25.976,-12.276 R9.1 -25.655,-12.25 -25.044,-11.952 -24.955,-11.913 R10.2@-24.945,-11.909
MIC1: J2.5 U1.9 | length 5.3
  Top Layer w0.152: v1(-11.85,-1.675) -11.748,-2.564 cw(c-11.9,-2.581) -11.751,-2.613 J2.5@-11.76,-2.656
  Bottom Layer w0.152: U1.9 -14.689,-1.125 -14.658,-0.736 -13.149,-0.296 cw(c-13.106,-0.442) -12.99,-0.343 v1(-11.85,-1.675)
MIC2: C12.2 U1.14 | length 13.4
  Bottom Layer w0.152: U1.14 -12.092,-2.88 -12.089,-2.879 cw(c-12.022,-3.016) -12.085,-2.877 -11.619,-2.664 cw(c-11.555,-2.802) -11.555,-2.65 -10,-2.65 -9.675,-2.975 -9.675,-3.35 -9.4,-3.625 -7.275,-3.625 -7.025,-3.375 -7.025,-0.75 -6.775,-0.5 -4.15,-0.5 -3.875,-0.775 -3.875,-1.975 C12.2@-3.9,-2
MIC3: C6.2 U1.16 | length 8.8
  Bottom Layer w0.152: U1.16 -11.871,-3.889 ccw(c-11.923,-3.746) -11.859,-3.885 -11.4,-3.675 -11.05,-4.025 -9.2,-4.025 -8.325,-4.9 -4.15,-4.9 -3.999,-4.749 -3.949,-4.749 -3.9,-4.7 C6.2
MIC4: C28.1 U1.18 | length 4.6
  Top Layer w0.152: v1(-9.65,-4.475) -9.61,-4.475 -9.385,-4.25 C28.1@-7.125,-4.25
  Bottom Layer w0.152: U1.18 -11.225,-4.659 -10.911,-4.505 cw(c-10.844,-4.642) -10.844,-4.49 -9.665,-4.49 v1(-9.65,-4.475)
mic_port_a: C6.1 J1.3 R1.1 | length 2.6
  Top Layer w0.152: J1.3@-2.05,-3.35 J1.3@-1.7,-3.35
  Bottom Layer w0.152: C6.1 -3.35,-3.95 R1.1 -2.753,-3.875 -2.692,-3.875 -2.648,-3.834 J1.3@-2.05,-3.275
mic_port_b: C12.1 J1.4 R2.1 | length 2.4
  Top Layer w0.152: J1.4@-2.1,-2.275 -2.05,-2.25 J1.4@-2.081,-2.29
  Bottom Layer w0.152: R2.1@-3.325,-2.875 -3.325,-2.249 C12.1 ; R2.1 -2.779,-2.9 -2.154,-2.275 -2.15,-2.275 J1.4@-2.05,-2.175
MISO: U1.1 U5.F5 U7.1 | length 6.9
  Bottom Layer w0.152: U5.F5 -20.248,-4.419 -20.008,-3.761 -18.293,-2.975 -18.282,-2.97 U1.1
  Bottom Layer w0.381: v1(-18.625,-3.9) U1.1@-18.1,-3.65
MOSI: U1.3 U5.F3 U7.14 | length 10.5
  Bottom Layer w0.152: U5.F3 -21.1,-4.326 -20.773,-3.209 -18.217,-1.933 ; -18.216,-1.933 cw(c-18.149,-2.07) -18.083,-1.932 -17.575,-2.175 ; v1@-17.65,-3.7 v1(-17.65,-3.725) ; v1@-17.629,-3.716 -17.641,-3.721 v1(-17.65,-3.725) ; -17.577,-2.176 U1.3@-17.237,-2.873 ; U1.3 -17.119,-3.234 -17.099,-3.329 cw(c-17.249,-3.359) -17.182,-3.496 -17.64,-3.72 v1(-17.65,-3.725)
NetC2_2: C2.2 C4.1 U1.28 U1.29 | length 3.8
  Bottom Layer w0.152: C4.1 -16.711,-10.108 -15.185,-9.363 -15.121,-9.348 -15.08,-9.307 -14.918,-9.145 -14.918,-8.872 -14.938,-8.852 U1.29@-14.938,-8.846 ; U1.28@-14.525,-8.45 -14.409,-8.588 -14.309,-8.794 ccw(c-14.172,-8.727) -14.23,-8.868 -13.813,-9.036 C2.2
NetC13_1: C13.1 U1.8 | length 0.6
  Top Layer w0.152: C13.1@-15.075,-1.625 v1(-14.82,-2.139)
NetC14_1: C14.1 U1.13 | length 5.7
  Top Layer w0.152: C14.1@-14.5,-5.35 -14.32,-5.225 -14.117,-5.126 ; -14.116,-5.126 ccw(c-14.184,-4.989) -14.032,-5.001 -13.874,-2.931 cw(c-13.722,-2.943) -13.789,-2.806 -12.597,-2.221 cw(c-12.53,-2.358) -12.499,-2.209 v1(-12.075,-2.3)
  Bottom Layer w0.152: U1.13@-12.975,-2.7 -12.658,-2.57 -12.495,-2.503 ccw(c-12.553,-2.362) -12.487,-2.499 v1(-12.075,-2.3)
NetC15_1: C15.1 U1.15 | length 3.6
  Top Layer w0.152: C15.1@-14.05,-6.3 -14.031,-6.283 -13.865,-6.136 -13.48,-5.948 ccw(c-13.547,-5.811) -13.395,-5.822 ; -13.395,-5.821 -13.281,-4.089 cw(c-13.129,-4.1) -13.191,-3.961 v1(-12.775,-3.775)
  Bottom Layer w0.152: v1(-12.775,-3.775) -12.584,-3.658 cw(c-12.504,-3.788) -12.53,-3.638 U1.15@-12.45,-3.625
NetC16_1: C16.1 U1.17 | length 3.4
  Top Layer w0.152: C16.1@-13.55,-7.025 -12.826,-6.663 -12.706,-4.889 v1(-12.341,-4.671)
  Bottom Layer w0.152: v1(-12.341,-4.671) -12.106,-4.557 U1.17@-11.975,-4.475
NetC21_1: C21.1 C22.2 U1.12 | length 4.1
  Top Layer w0.152: C21.1@-14.925,-2.825 -14.885,-2.808 -14.656,-2.71 -13.953,-2.368 cw(c-13.886,-2.505) -13.915,-2.355 v1(-13.5,-2.275) ; v1(-12.275,-1.85) -12.247,-1.822 -12.247,-1.572 -12.025,-1.35 -11.575,-1.35 -11.425,-1.5 C22.2@-11.425,-1.75
  Bottom Layer w0.152: v1(-13.5,-2.275) U1.12@-13.185,-2.297 ; U1.12@-13.185,-2.297 U1.12@-13.15,-2.3 ; U1.12@-12.866,-2.138 -12.533,-1.976 v1(-12.275,-1.85)
NetC23_2: C23.2 R3.2 U1.27 | length 10.5
  Top Layer w0.152: v1(-17.25,-10.9) -17.046,-11.104 -14.493,-9.818 -13.975,-9.3 v1(-13.975,-8.425)
  Bottom Layer w0.152: C23.2@-17.475,-10.5 -17.403,-10.586 v1(-17.25,-10.9) v1@-17.259,-10.891 ; v1(-13.975,-8.425) -13.525,-8.575 -10.651,-7.138 -10.241,-7.306 -9.286,-6.819 R3.2
NetC27_2: C27.2 R5.2 U4.3 | length 1.5
  Top Layer w0.152: U4.3 -24.014,-6.159 -23.919,-5.609 R5.2@-23.825,-5.475 ; C27.2 C27.2@-23.175,-5.15
  Top Layer w0.381: R5.2@-23.85,-5.475 R5.2@-23.83,-5.465 ; R5.2@-23.829,-5.465 C27.2@-23.175,-5.15
NetC28_2: C28.2 MK1.1 | length 2.4
  Top Layer w0.152: C28.2@-6.475,-4.25 -6.496,-4.229 -6.496,-3.121 MK1.1
  Bottom Layer w0.152: v1(-6.65,-4.5) v1(-6.65,-3.3)
NetC29_2: C29.2 MK1.12 R7.2 | length 2.1
  Top Layer w0.381: R7.2 MK1.12@-4.55,-3.135 ; C29.2 R7.2@-4.52,-4.45
NetD1_2: pad.2@-22.1,-7.125 R6.1 | length 0.9
  Top Layer w0.381: R6.1@-22.525,-7.825 -22.524,-7.82 -22.507,-7.69 -22.105,-7.25 pad.2@-22.1,-7.125
NetJ2_7: J2.7 R4.1 | length 3.6
  Top Layer w0.152: v1@-11.322,-2.278 v1(-11.35,-2.25) -11.304,-2.511 J2.7@-11.275,-2.65
  Bottom Layer w0.152: v1(-11.35,-2.25) -10.275,-2.25 -10,-1.975 -10,-1.275 -9.675,-0.95 R4.1
OUT_EN: U5.C2 U6.3 | length 1.6
  Top Layer w0.152: U6.3@-20.65,-9.3 -20.37,-9.186 -19.903,-9.279 -19.385,-9.013 v2(-19.32,-8.811)
RCVN: J1.1 U1.21 | length 10.1
  Top Layer w0.152: v1(-11.3,-7.075) -11.113,-7.407 ; -11.1,-7.4 -10.852,-7.473 -7.309,-5.727 -2.753,-5.727 -2.529,-5.503 J1.1@-1.875,-5.5
RCVP: J1.2 U1.22 | length 14.4
  Top Layer w0.152: v1(-11.75,-7.3) -11.467,-7.884 -11.455,-7.923 -11.425,-7.952 -11.275,-8.102 -10.544,-8.102 -6.775,-6.25 -1.125,-6.25 -0.65,-5.775 -0.65,-4.725 -0.876,-4.499 -1.576,-4.499 J1.2
SCLK: U1.2 U5.F4 U7.13 | length 9.5
  Top Layer w0.152: v1(-17.95,-2.525) -17.922,-2.553 -17.672,-2.553 -17.65,-2.575 -17.461,-2.963 U7.13
  Bottom Layer w0.152: U5.F4 -20.646,-4.45 -20.349,-3.435 -18.227,-2.387 v1(-17.95,-2.525) -17.839,-2.753 U1.2@-17.772,-2.932 ; U1.2@-17.859,-2.763 U1.2@-17.772,-2.932 ; U1.2@-17.709,-3.103 U1.2@-17.772,-2.932 ; U1.2@-17.709,-3.104 U1.2@-17.575,-3.425 ; U1.2 U1.2@-17.772,-2.932
SPI_SCK: R13.1 TP8.1 U5.E1 | length 8.5
  Top Layer w0.152: v1(-25.5,-8.825) -25.466,-8.688 -25.466,-8.366 -25.175,-8.075 -25.175,-7.175 TP8.1@-25.175,-7.075
  Bottom Layer w0.152: v1(-25.5,-8.825) -24.682,-9.039 -21.038,-7.237 -20.745,-7.457 -20.725,-7.5 -20.403,-8.199 U5.E1
SPI_SDO: TP5.1 U5.F2 | length 8.6
  Int2 (PWR) w0.152: v1(-26.225,-8.45) -25.5,-8.45 v1(-23.2,-6.15)
  Bottom Layer w0.152: v1(-23.2,-6.15) -22.03,-7.047 -20.773,-6.471 -20.314,-6.773 U5.F2
SPI_SI: R12.1 TP6.1 U5.D1 | length 8.8
  Top Layer w0.152: TP6.1 -27.058,-9.465 -26.796,-9.67 ; -26.795,-9.67 ccw(c-26.702,-9.55) -26.642,-9.69 -25.656,-9.274 cw(c-25.597,-9.414) -25.559,-9.266 -25.155,-9.37 -25.079,-9.389 R12.1@-25,-9.475
  Int2 (PWR) w0.152: v1(-25.161,-9.395) -24.8,-9.679 -21.098,-7.853 -20.722,-8.01 -20.531,-8.41 ccw(c-20.393,-8.346) -20.432,-8.493 v2(-19.795,-8.661)
SPI_SS_B: R14.1 TP7.1 U5.F1 | length 9
  Bottom Layer w0.152: v1(-25.575,-7.725) -25.532,-7.768 -24.877,-8.046 -23.387,-7.371 -22.496,-7.571 -20.873,-6.835 -20.55,-7.05 U5.F1
  Bottom Layer w0.254: v1(-25.575,-7.725) -25.584,-7.716 -25.584,-7.384 -24.798,-6.438 cw(c-24.602,-6.6) -24.687,-6.36 -24.187,-6.185 -24.037,-6.297 R14.1@-24,-6.325
SPI_VCCIO1: C1.2 C3.1 C25.2 C30.2 C31.2 C32.2 C33.2 C35.2 C36.2 C37.2 pad.1@-17.222,-10.162 R3.1 R6.2 R8.2 R12.2 R13.2 U1.40 U4.2 U5.A4 U5.B3 U5.C3 U5.C4 U5.D4 U6.10 U7.5 U7.8 | length 33.5
  Top Layer w0.152: v1(-24.775,-10.25) -24.655,-10.296 cw(c-24.71,-10.438) -24.577,-10.364 R8.2@-24.5,-10.5 ; U4.2 -23.492,-5.933 -23.042,-5.708 C25.2@-22.775,-5.775 ; U6.10 -22.502,-11.307 -21.848,-12.647 -22.07,-13.09 v3(-22.075,-13.1) ; C25.2 -22.511,-5.711 -22.347,-5.875 -22.225,-5.875 -21.3,-5.425 -21.223,-5.348 -21.223,-4.802 v1@-21.225,-4.8 ; v1@-21.218,-4.752 -21.264,-4.25 -20.296,-3.78 -19.538,-4.437 ; v1@-21.195,-4.76 -21.012,-4.671 C35.2@-20.925,-4.65 ; v1(-20.791,-5.67) -20.577,-5.566 C36.2@-20.5,-5.55 ; -19.537,-4.438 ccw(c-19.438,-4.322) -19.488,-4.466 -19.122,-4.592 v1(-19.1,-4.6) -18.401,-6.046 -18.019,-6.24 ; v1@-18.1,-11.35 -17.665,-11.121 -17.691,-10.538 pad.1@-17.392,-10.392 ; -18.019,-6.24 ccw(c-17.95,-6.104) -17.88,-6.239 -16.883,-5.73 ccw(c-16.952,-5.594) -16.815,-5.528 -16.833,-5.492 U7.5@-16.825,-5.475 ; pad.1@-17.423,-10.329 -17.222,-10.162 -17.212,-10.15 -17.042,-9.954 -16.607,-9.741 -16.511,-9.293 -13.825,-7.95 -13.755,-7.915 -12.978,-8.359 -12.822,-8.428 -12.793,-8.428 -12.547,-8.428 v1(-12.525,-8.45) ; pad.1@-17.167,-10.251 pad.1@-17.125,-10.225 ; U7.5@-17.07,-5.026 U7.5 ; -13.755,-7.914 -10.376,-6.174 ; -10.35,-6.175 v1(-9.825,-6.35)
  Top Layer w0.381: R13.2 -24.644,-8.511 R12.2@-24.35,-9.075
  Bottom Layer w0.152: v1(-19.175,-9.95) -18.374,-9.562 -18.362,-9.532 -18.291,-9.347 U5.A4 U5.B3 U5.B3 -19.001,-8.663 U5.C3 ; v1(-19.1,-4.6) -18.826,-4.466 U1.40@-18.8,-4.475 ; U5.C3@-19,-8.65 U5.C3 ; U5.D4 U5.C4 -18.998,-8.654 U5.C3 ; U1.40@-18.804,-4.425 U1.40@-18.7,-4.425
  Bottom Layer w0.381: C37.2@-23.563,-10.069 -23.269,-10.663 C32.2 ; C32.2@-22.974,-11.265 -22.676,-11.867 C30.2@-22.4,-12.425 ; C30.2 v3(-22.075,-13.1) ; v1(-9.825,-6.35) R3.1 ; R3.1@-9.5,-6.2 -9.492,-6.196 C3.1
  other v1: -18.119,-11.343 -24.475,-8.275 -23.7,-8.075 -21.223,-4.768
  other v2: -18.867,-8.96
VCC: C19.2 C34.2 U3.4 U5.A5 | length 11.1
  Bottom Layer w0.152: U3.4@-25.475,-12.85 -25.15,-12.952 -25.015,-13.228 C19.2@-24.977,-13.32 ; v1(-24.75,-14.125) -24.673,-14.217 ccw(c-24.556,-14.12) -24.549,-14.272 -23.359,-14.222 -19.385,-12.259 -18.951,-11.231 ; -18.942,-11.217 -18.338,-10.899 -18.151,-10.456 -18.28,-10.177 -17.947,-9.299 U5.A5
  Bottom Layer w0.381: C19.2 C34.2@-24.7,-13.875
pads on no net: U1.6 U1.7 U1.25 U1.26 U1.35 U1.36 U1.37 U1.38 U3.5 U3.6 U5.A2 U5.A6 U5.B2 U5.B4 U5.B5 U5.E2 U5.E3 U7.2 U7.3 U7.4 U7.9 U7.10 U7.11

## Polygon pours and split planes (outlines as drawn)
+3V3_A on Int2 (PWR) "+3V3_A_L03_P002" (solid, pour order 2): -13.975,-0.475 -10.225,-8.025 -17.35,-11.55 -21.3,-3.2 -17.6,-1.4 -14,-0.475
SPI_VCCIO1 on Int2 (PWR) "SPI_VCCIO1_L03_P000" (solid, pour order 0): -21.6,-3.275 -17.575,-11.675 -23.275,-14.475 -25.15,-14.5 -25.55,-14.3 -25.9,-14.35 -26.225,-14.55 -28.55,-10.15 -28.3,-9.95 -28,-9.725 -27.9,-9.475 -24.55,-5.225 -22.9,-3.925 -21.625,-3.275
+1V8 on Int2 (PWR) "+1V8_L03_P003" (solid, pour order 3): -13.7,-0.4 -9.95,-7.875 -6.9,-6.475 -1.025,-6.475 -0.275,-5.7 -0.275,-0.1 -12.9,-0.125 -13.65,-0.425
GND on Int1 (GND) "GND_L02_P001" (solid, pour order 1): -0.325,-5.675 -0.975,-6.4 -6.9,-6.4 -23.35,-14.375 -25.2,-14.4 -25.575,-14.275 -25.85,-14.3 -26.2,-14.525 -28.55,-10.175 -28.35,-10.025 -28.075,-9.9 -27.9,-9.525 -24.525,-5.25 -22.875,-3.9 -17.475,-1.325 -12.975,-0.1 -0.475,-0.125 -0.325,-0.2

## Other copper
Top Layer:
  region net SPI_VCCIO1: -16.695,-5.696 -16.794,-5.762 -16.929,-5.446 -16.727,-5.423 cw(c-16.723,-5.464) -16.69,-5.44 ccw(c-16.379,-5.215) -16.65,-5.486 -16.65,-5.549 cw(c-16.774,-5.592)
  region net GND: -5.775,-0.738 -5.21,-0.738 -5.235,-2.763 -5.775,-2.763
  region net GND: -6.775,-0.738 -6.21,-0.738 -6.235,-2.763 -6.775,-2.763
  region net GND: -4.8,-0.738 -4.235,-0.738 -4.26,-2.763 -4.8,-2.763
  region net SPI_VCCIO1: -15.4,-4.35 -15.684,-4.484 -15.838,-4.484 -16.192,-4.218 -16.932,-4.571 -16.996,-4.78 -16.896,-4.984 -17.076,-5.111 -17.106,-5.104 -17.308,-4.719 -17.207,-4.408 -16.207,-3.925 -15.773,-4.251 -15.55,-4.15
  region net GND: -15.175,-5.35 -16.675,-6.075 -15.55,-8.4 -14.05,-7.675
  region net GND: -16.063,-4.475 -16.688,-4.775 -16.413,-5.35 -15.788,-5.05
  region net GND: -12.175,-2.6 -13.4,-2.8 -13.3,-3.45 -12.075,-3.225
  region net GND: -22,-5.225 -22.225,-4.725 -22.425,-4.825 -22.225,-5.325
  region net GND: -11,-4.925 -12.225,-5.125 -12.125,-5.75 -10.9,-5.575
Bottom Layer:
  region net NetC2_2: -15.291,-8.147 -14.74,-7.886 -14.393,-8.606 -14.945,-8.867

## Silkscreen, mask and mechanical layers (free items; w line width, h text height)
Top Overlay:
  circle w0.076: c-20.716,-7.205 r0.125
  lines w0.076: -22.413,-6.751 -21.47,-6.291 ; -21.997,-7.565 -21.053,-7.104 ; -19.057,-10.311 -17.249,-9.429 ; -18.437,-11.514 -16.629,-10.632
  text "D1" at -21.311,-7.744 h0.3 r25
  text "R11" at -16.592,-10.068 h0.3 r25
Bottom Overlay:
  text "R14" at -21.457,-5.363 h0.3 r26
  text "OSP UC San Diego" at -3.055,-6.087 h0.25
Mechanical 3:
  lines w0.076: -27.398,-14.405 -29,-11.1 -29,-10.4 -28.575,-9.925 ccw(c-28.653,-9.275) -28.003,-9.197 -24.9,-5.3 -22.944,-3.767 -17.516,-1.192 -12.947,0 0,0 0,-5.739 -0.936,-6.675 -6.75,-6.675 -23.308,-14.625 -23.784,-14.625 -24.738,-14.625 -25.265,-14.625 ; -27.385,-14.409 -26.798,-14.79 ; -26.773,-14.796 -26.177,-14.704 cw(c-25.674,-15.123) -25.255,-14.621
  text "R11" at -59.592,91.032 h0.3 r25
  text "R11" at -19.644,-11.299 h0.3 r25
  text "U6" at -21.734,-12.019 h0.3 r24
Top 3D Body:
  lines w0.2: -22.319,-6.86 -21.375,-6.4 -21.09,-6.984 -22.034,-7.445 -22.319,-6.86 ; -18.725,-10.45 -18.374,-11.169 -16.936,-10.468 -17.287,-9.749 -18.725,-10.45
Top Courtyard:
  lines w0.2: -22.61,-6.891 -21.172,-6.19 -20.799,-6.954 -22.237,-7.655 -22.61,-6.891 ; -19.066,-10.449 -18.584,-11.438 -16.595,-10.468 -17.078,-9.48 -19.066,-10.449
Top Assembly:
  lines w0.2: -22.61,-6.891 -21.172,-6.19 -20.799,-6.954 -22.237,-7.655 -22.61,-6.891 ; -19.066,-10.449 -18.584,-11.438 -16.595,-10.468 -17.078,-9.48 -19.066,-10.449
  text ".Designator" at -21.705,-6.922 h1 r206
  text ".Designator" at -18.618,-10.944 h1 r206
Top Component Center:
  lines w0.1: -22.154,-7.141 -21.255,-6.703 ; -21.924,-6.473 -21.485,-7.372 ; -18.28,-10.678 -17.381,-10.24 ; -18.05,-10.009 -17.611,-10.908
Mechanical 15:
  lines w0.05: -23.782,-9.161 -22.425,-11.825 -20.275,-10.75 -20.149,-10.34 -21.312,-7.99 -23.782,-9.161
  text "U7" at -19.005,-3.587 h0.3 r24
  text "U4" at -24.606,-7.575 h0.3 r24
Mechanical 16:
  lines w0.05: -26.272,-11.839 -24.614,-11.03 -23.957,-12.376 -25.615,-13.185 -26.272,-11.839 ; -20.446,-7.902 -19.446,-9.951 -17.397,-8.951 -18.397,-6.902 -20.446,-7.902
  text "U1" at -19.517,-3.174 h0.3 r25
  text "U5" at -19.278,-7.164 h0.3 r25
  text "U3" at -25.758,-13.065 h0.3 r27